# EAGLE board Sensor-Board_p_cad_eagle (EAGLE 7.5.0)
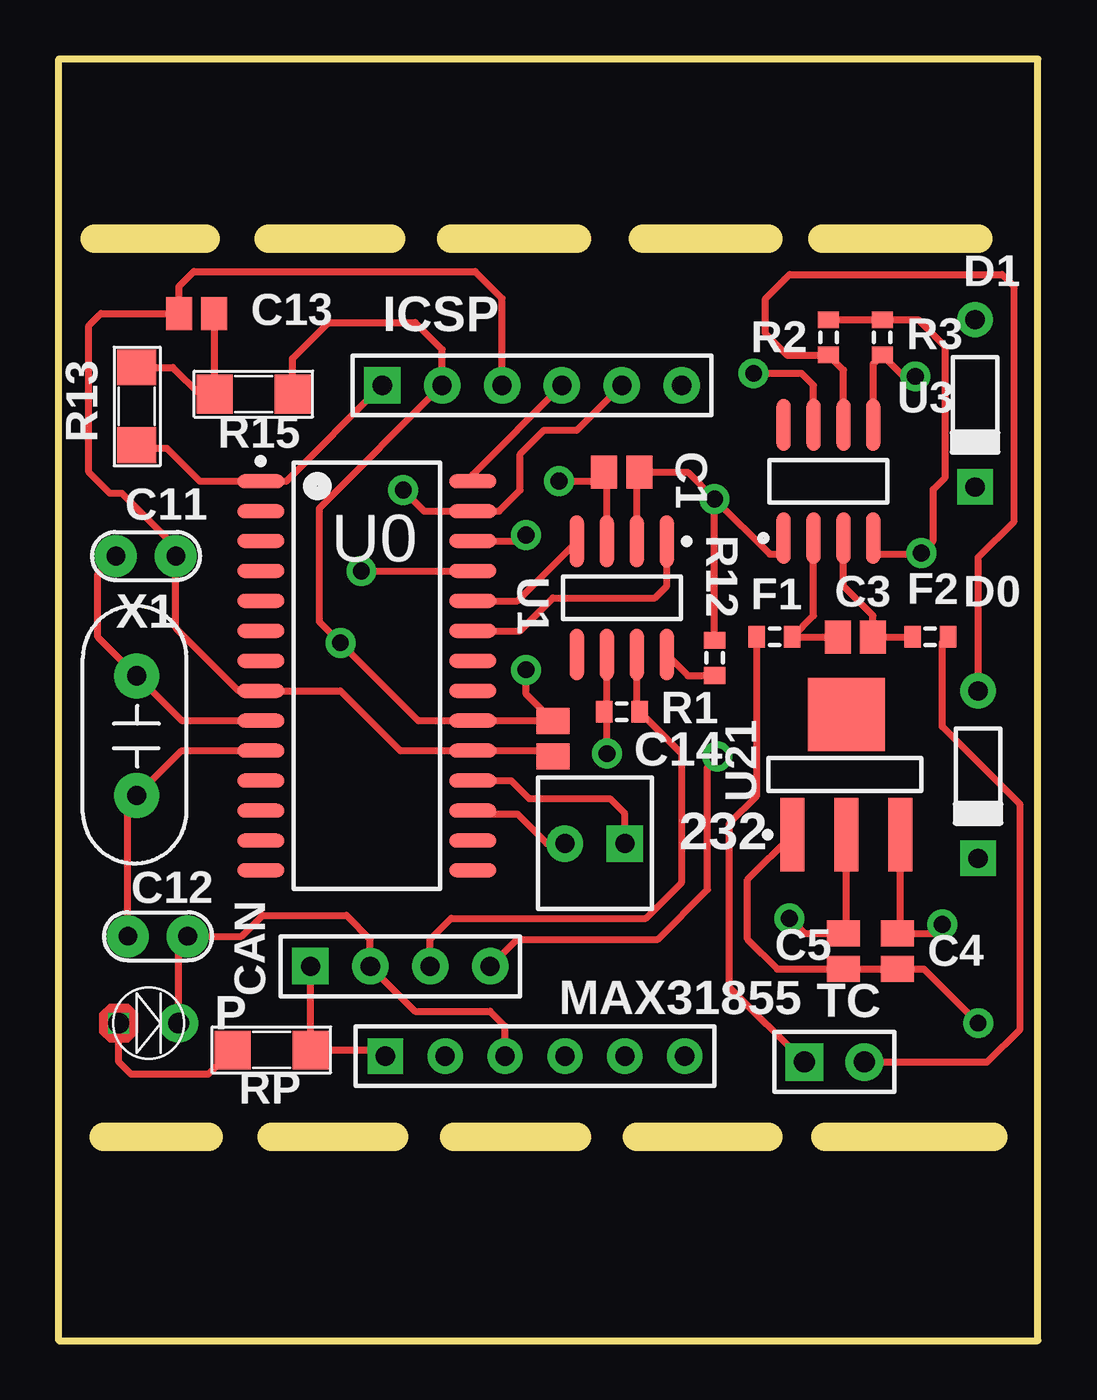
[diagram p0: board, top side]
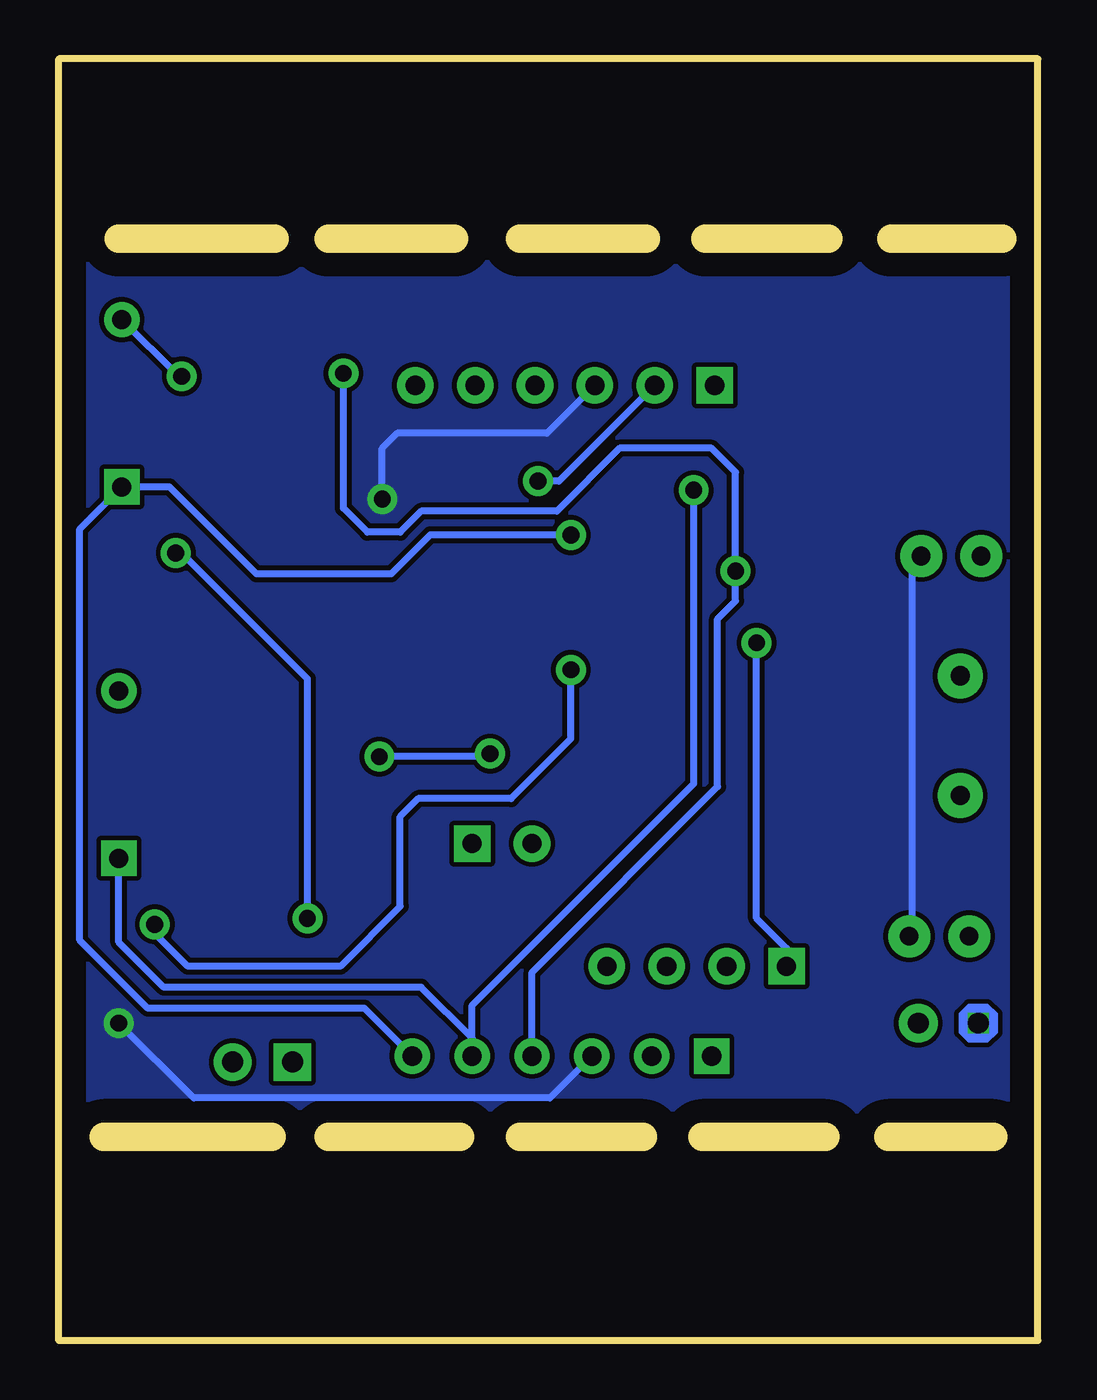
[diagram p1: board, bottom side, seen from below]

Size 41.53 x 54.36 mm. Coordinates in mm from the lower left corner, seen from the top.
Outline: 32.51,8.64 39.62,8.64
Outline: 32.39,46.74 38.99,46.74
Outline: 24.76,46.74 30.1,46.74
Outline: 1.91,8.64 6.35,8.64
Outline: 9.02,8.64 14.22,8.64
Outline: 16.76,8.64 21.97,8.64
Outline: 24.51,8.64 30.1,8.64
Outline: 16.64,46.74 21.97,46.74
Outline: 8.89,46.74 14.1,46.74
Outline: 1.52,46.74 6.22,46.74
Outline: 41.53,0 41.53,54.36 0,54.36 0,0 41.53,0
Copper layers (1*16): Top 0.035mm / dielectric 1.5mm / Bottom 0.035mm
Design rules "Sensor-Board_p_cad": minimum track width 10mil, minimum drill 24mil, track to track 8mil, track to pad 8mil, pad to pad 8mil, via to via 8mil, smd to smd 8mil, copper to edge 40mil, drill to drill 8mil, minimum pad ring 0mil, minimum via ring 0mil, stop-mask expansion 4mil, vias tented up to drill 0mil, thermal gap 10mil

## Footprints (pad centres in the part's own frame; a part is rotated, then mirrored left to right if it is on the bottom)
HDR2_1PRIMARY = drill 0.813 pad 1.549 square: 1 0,0 | drill 0.813 pad 1.549: 2 2.54,0
C0805_1PRIMARY = smd 1.1 x 1.4: 1 -0.75,0; 2 0.75,0
CN1_1PRIMARY = drill 0.787 pad 1.778: 1 -1.27,0; 2 1.27,0
HDR1X4_1PRIMARY = drill 0.813 pad 1.549 square: 1 0,0 | drill 0.813 pad 1.549: 2 2.54,0; 3 5.08,0; 4 7.62,0
DO-35_1PRIMARY = drill 0.813 pad 1.5: 1 -3.55,0 | drill 0.813 pad 1.5 square: 2 3.55,0
J1-0603_1PRIMARY = smd 0.7 x 0.9: 1 -0.75,0; 2 0.75,0
HDR1X6_2PRIMARY = drill 0.813 pad 1.549 square: 1 0,0 | drill 0.813 pad 1.549: 2 2.54,0; 3 5.08,0; 4 7.62,0; 5 10.16,0; 6 12.7,0
HDR1X6_1PRIMARY = drill 0.813 pad 1.5 square: 1 0,0 | drill 0.813 pad 1.5: 2 2.54,0; 3 5.08,0; 4 7.62,0; 5 10.16,0; 6 12.7,0
LED-3MM-YELLOW_1PRIMARY = drill 0.889 pad 0.838 square: 1 0,0 | drill 0.889 pad 1.651: 2 2.54,0
SM-RES-1206_1PRIMARY = smd 1.524 x 1.651: 1 0,0; 2 3.302,0
JP2-D1T_1PRIMARY = drill 0.889 pad 1.6 square: 1 0,0 | drill 0.889 pad 1.6: 2 2.54,0
SOIC-SO28_L_1PRIMARY = smd 2 x 0.6: 1 -4.5,8.255; 2 -4.5,6.985; 3 -4.5,5.715; 4 -4.5,4.445; 5 -4.5,3.175; 6 -4.5,1.905; 7 -4.5,0.635; 8 -4.5,-0.635; 9 -4.5,-1.905; 10 -4.5,-3.175; 11 -4.5,-4.445; 12 -4.5,-5.715; 13 -4.5,-6.985; 14 -4.5,-8.255; 15 4.5,-8.255; 16 4.5,-6.985; 17 4.5,-5.715; 18 4.5,-4.445; 19 4.5,-3.175; 20 4.5,-1.905; 21 4.5,-0.635; 22 4.5,0.635; 23 4.5,1.905; 24 4.5,3.175; 25 4.5,4.445; 26 4.5,5.715; 27 4.5,6.985; 28 4.5,8.255
SOIC-SN8_N_1PRIMARY = smd 2.2 x 0.6: 1 -2.4,1.905; 2 -2.4,0.635; 3 -2.4,-0.635; 4 -2.4,-1.905; 5 2.4,-1.905; 6 2.4,-0.635; 7 2.4,0.635; 8 2.4,1.905
SOP8_-_DUPLICATE_1PRIMARY = smd 2.2 x 0.6: 1 1.283,5.969; 2 1.283,4.699; 3 1.283,3.429; 4 1.283,2.159; 5 6.083,2.159; 6 6.083,3.429; 7 6.083,4.699; 8 6.083,5.969
SOT229P700X460-4N_1PRIMARY = smd 3.1 x 1: 1 -2.55,2.29; 2 -2.55,0; 3 -2.55,-2.29 | smd 3.1 x 3.25: 4 2.55,0
XT2_1PRIMARY = drill 0.813 pad 1.905: 1 -2.54,0; 2 2.54,0

## Placement (x,y rotation side)
232  Header2  [HDR2_1PRIMARY]  24,21.08 180 top
C1  Cap_Pol3  [C0805_1PRIMARY]  23.88,36.83 0 top
C3  Cap_Pol3  [C0805_1PRIMARY]  33.78,29.84 0 top
C4  Cap_Pol3  [C0805_1PRIMARY]  35.56,16.51 270 top
C5  Cap_Pol3  [C0805_1PRIMARY]  33.27,16.51 270 top
C11  22pF  [CN1_1PRIMARY]  3.68,33.27 0 top
C12  22pF  [CN1_1PRIMARY]  4.19,17.15 0 top
C13  Cap_Pol3  [C0805_1PRIMARY]  5.84,43.56 180 top
C14  Cap_Pol3  [C0805_1PRIMARY]  20.95,25.53 270 top
CAN  Header_4  [HDR1X4_1PRIMARY]  10.67,15.88 0 top
D0  Diode_1N4148  [DO-35_1PRIMARY]  38.99,24 270 top
D1  Diode_1N4148  [DO-35_1PRIMARY]  38.86,39.75 270 top
F1  Res3  [J1-0603_1PRIMARY]  30.35,29.84 180 top
F2  Res3  [J1-0603_1PRIMARY]  36.96,29.84 0 top
ICSP  Header_6  [HDR1X6_2PRIMARY]  13.72,40.51 0 top
MAX31855  Header_6  [HDR1X6_1PRIMARY]  13.84,12.07 0 top
P  LED  [LED-3MM-YELLOW_1PRIMARY]  2.54,13.46 0 top
R1  Res3  [J1-0603_1PRIMARY]  23.88,26.67 0 top
R2  Res3  [J1-0603_1PRIMARY]  32.64,42.55 90 top
R3  Res3  [J1-0603_1PRIMARY]  34.92,42.55 90 top
R12  Res3  [J1-0603_1PRIMARY]  27.81,28.96 90 top
R13  470  [SM-RES-1206_1PRIMARY]  3.3,41.28 270 top
R15  10k  [SM-RES-1206_1PRIMARY]  6.6,40.13 0 top
RP  10k  [SM-RES-1206_1PRIMARY]  7.37,12.32 0 top
TC  JP2  [JP2-D1T_1PRIMARY]  31.62,11.81 0 top
U0  PIC18F2480T-I/SO  [SOIC-SO28_L_1PRIMARY]  13.06,28.19 0 top
U1  MCP2551-E/SN  [SOIC-SN8_N_1PRIMARY]  23.88,31.5 270 top
U3  Component_1  [SOP8_-_DUPLICATE_1PRIMARY]  36.7,32.75 90 top
U21  Component_1  [SOT229P700X460-4N_1PRIMARY]  33.4,24 90 top
X1  12Mhz  [XT2_1PRIMARY]  3.3,25.65 90 top

## Library data of the parts
232 C1 C3-C5 C11-C14 CAN D0 D1 F1 F2 ICSP MAX31855 P R1-R3 R12 R13 R15 RP TC U0 U1 U3 U21 X1 = Sensor-Board_p_cad

## Nets
NET232_1: 232.1 U0.18
NET232_2: 232.2 U0.17
NETC11_1: C11.1 U0.9 X1.2
NETC12_1: C12.1 U0.10 X1.1
NETC13_1: C13.1 R13.1 R15.1
NETCAN_3: CAN.3 R1.2 U1.7
NETCAN_4: CAN.4 R1.1 U1.6
NETD0_2: D0.2 ICSP.5 MAX31855.5 U0.27
NETD1_2: D1.2 MAX31855.6 U0.26
NETF1_2: F1.2 TC.1
NETF2_2: F2.2 TC.2
NETICSP_1: ICSP.1 R13.2 U0.1
NETICSP_4: ICSP.4 U0.28
NETP_1: P.1 RP.1
NETR12_1: R12.1 U1.8
NETU0_23: U0.23 U1.1
NETU0_24: U0.24 U1.4
VCC1: C1.1 C4.1 C14.1 CAN.1 ICSP.2 MAX31855.1 R15.2 RP.2 U0.20 U1.3 U21.3

## Tracks (layer width: path | path; a pad name or v marks a point on that pad's centre or on a via)
3.3V  (via drill 0.71 pad 1.27)
  Top 0.305: v30.99,17.91 31.64,17.26 33.27,17.26 33.4,17.39 33.4,21.45 | 32.64,43.3 36.46,43.3 37.59,42.16 37.59,36.61 37.08,36.1 37.08,33.91 v36.58,33.4 36.53,33.35 34.54,33.35
  Bottom 0.305: v36.58,33.4 36.32,33.4 30.99,28.07 v30.99,17.91
GND1  (via drill 0.71 pad 1.27)
  Top 0.305: v38.99,13.46 36.69,15.76 30.47,15.76 29.21,17.02 29.21,19.55 31.11,21.45 | 18.92,12.07 18.92,13.34 18.29,13.97 15.11,13.97 13.21,15.88 13.21,17.02 12.19,18.03 8.64,18.03 7.75,17.15 5.46,17.15 5.08,16.76 5.08,13.46 | v27.81,35.69 30.15,33.35 30.73,33.35 | 18.8,40.51 18.8,44.2 17.65,45.34 5.72,45.34 5.09,44.72 5.09,43.56 1.78,43.56 1.27,43.05 1.27,36.83 2.16,35.94 2.67,35.94 4.95,33.66 4.95,30.23 7.62,27.56 8.51,27.56 | v27.81,35.69 26.67,36.83 24.63,36.83 24.51,36.72 24.51,33.9 | 27.81,29.71 v27.81,35.69 | 20.95,24.78 20.71,25.02 14.48,25.02 11.94,27.56 8.56,27.56
  Bottom 0.305: v27.81,35.69 27.81,37.85 27.18,38.48 20.83,38.48 18.8,40.51 | 5.33,18.03 5.33,32.89 4.95,33.27 | 18.92,12.07 20.7,10.29 35.81,10.29 v38.99,13.46
  pour Bottom (no thermals): 0,54.29 0.06,54.36 41.4,54.36 41.4,0.13 41.27,0 0.13,0 0.13,54.23 0.25,54.36
NET232_1
  Top 0.305: 232.1 24,22.35 23.37,22.99 19.94,22.99 19.18,23.75 U0.18
NET232_2
  Top 0.305: 232.2 20.7,21.08 19.46,22.33 17.71,22.33 U0.17
NETC3_1
  Top 0.305: 33.03,29.85 31.1,29.85 32,30.75 32,33.35
NETC3_2
  Top 0.305: 36.21,29.85 34.53,29.85 34.53,30.75 33.27,32 33.27,33.35
NETC11_1
  Top 0.305: 8.51,26.29 5.21,26.29 1.65,29.85 1.65,32.51 C11.1
NETC12_1
  Top 0.305: 8.51,25.02 5.21,25.02 X1.1 2.92,22.73 C12.1
NETC13_1
  Top 0.305: 6.6,43.43 R15.1 5.97,40.13 4.83,41.28 R13.1
NETCAN_3
  Top 0.305: CAN.3 15.75,17.02 16.64,17.91 24.89,17.91 26.42,19.43 26.42,24.88 R1.2 24.51,26.79 U1.7
NETCAN_4  (via drill 0.71 pad 1.27)
  Top 0.305: v27.94,24.77 27.51,24.33 27.51,19.13 25.4,17.02 19.43,17.02 CAN.4 | v23.24,24.89 23.24,26.56 R1.1 23.24,26.79 U1.6
  Bottom 0.305: v23.24,24.89 23.37,24.77 v27.94,24.77
NETD0_1
  Top 0.305: 38.99,27.55 38.99,33.22 40.51,34.75 40.51,44.7 40,45.21 30.99,45.21 29.97,44.2 29.97,42.7 30.87,41.8 32.64,41.8 33.27,41.16 33.27,38.84
NETD0_2  (via drill 0.71 pad 1.27)
  Top 0.305: v14.6,36.07 15.49,35.18 U0.27 18.67,35.18 19.56,36.07 19.56,37.59 20.57,38.61 21.97,38.61 ICSP.5 | 23.38,40.4 23.5,40.51
  Bottom 0.305: D0.2 38.99,16.89 37.08,14.99 26.16,14.99 24,12.83 | v14.6,36.07 14.6,23.62 24,14.22 24,12.83 | MAX31855.5 24,12.83
NETD1_1  (via drill 0.71 pad 1.27)
  Top 0.305: 38.73,43.18 38.73,42.79 38.68,42.85 | 34.54,38.84 34.54,41.41 34.92,41.8 35.95,40.77 36.2,40.77
  Bottom 0.305: v36.32,40.89 36.46,40.89 38.86,43.3
NETD1_2  (via drill 0.71 pad 1.27)
  Top 0.305: v19.81,34.16 19.56,33.91 U0.26
  Bottom 0.305: MAX31855.6 28.58,14.1 37.76,14.1 40.64,16.97 40.64,34.42 D1.2 36.84,36.2 33.15,32.51 27.43,32.51 25.78,34.16 v19.81,34.16
NETF1_2
  Top 0.305: TC.1 28.45,14.99 28.45,21.95 29.6,23.1 F1.2
NETF2_2
  Top 0.305: TC.2 39.37,11.81 40.77,13.21 40.77,22.73 37.47,26.04 37.47,29.6 F2.2
NETICSP_1
  Top 0.305: ICSP.1 9.65,36.45 5.97,36.45 4.57,37.85 3.17,37.85
NETICSP_4
  Top 0.305: ICSP.4 17.56,36.74 U0.28 18.03,36.45
  Bottom 0.305: ICSP.4 21.34,41.02
NETMAX31855_4  (via drill 0.71 pad 1.27)
  Top 0.305: v12.83,32.64 17.56,32.64 | v29.46,41.02 31.5,41.02 32,40.51 32,38.84
  Bottom 0.305: 21.46,12.07 21.46,15.62 13.59,23.5 13.59,30.61 12.83,31.37 v12.83,32.64 12.83,36.83 13.84,37.85 17.75,37.85 20.41,35.18 26.16,35.18 27.05,34.29 28.45,34.29 29.46,35.31 v29.46,41.02
NETP_1
  Top 0.305: RP.1 6.35,11.3 3.05,11.3 2.54,11.81 P.1
NETR12_1
  Top 0.305: R12.1 26.67,28.21 U1.8
NETU0_23
  Top 0.305: U1.1 25.78,32 25.27,31.5 20.95,31.5 19.56,30.1 U0.23
NETU0_24
  Top 0.305: U1.4 19.44,31.37 U0.24
VCC1  (via drill 0.71 pad 1.27)
  Top 0.305: 20.94,26.29 C14.1 | 20.94,26.29 19.81,27.42 v19.81,28.45 | v37.47,17.65 37.07,17.26 C4.1 35.69,17.39 U21.3 | MAX31855.1 13.59,12.32 RP.2 CAN.1 | 20.94,26.29 U0.20 15.24,26.29 v11.94,29.59 11.05,30.48 11.05,35.31 ICSP.2 16.26,42.04 15.11,43.18 11.43,43.18 9.91,41.66 R15.2 | v21.21,36.45 22.75,36.45 C1.1 23.24,36.72 U1.3
  Bottom 0.305: v19.81,28.45 19.81,25.53 22.35,22.99 26.29,22.99 27.05,22.23 27.05,18.42 29.59,15.88 36.07,15.88 37.47,17.27 v37.47,17.65 | CAN.1 10.67,16.64 11.94,17.91 v11.94,29.59 | v21.21,36.45 20.32,36.45 ICSP.2